# EAGLE board test pcb (EAGLE 7.7.0)

Size 100 x 80 mm. Coordinates in mm from the lower left corner, seen from the top.
Outline: 0,0 100,0 100,80 0,80 0,0
Copper layers (1*16): Top 0.035mm / dielectric 1.5mm / Bottom 0.035mm
Design rules "default": minimum track width 10mil, minimum drill 24mil, track to track 8mil, track to pad 8mil, pad to pad 8mil, via to via 8mil, smd to smd 8mil, copper to edge 40mil, drill to drill 8mil, minimum pad ring 10mil, minimum via ring 8mil, stop-mask expansion 4mil, vias tented up to drill 0mil, thermal gap 10mil

## Footprints (pad centres in the part's own frame; a part is rotated, then mirrored left to right if it is on the bottom)
HOLES = drill 3 pad 5: P$1 0,0

## Placement (x,y rotation side)
U$1  HOLES  [HOLES]  76.2,8.89 0 top
U$2  HOLES  [HOLES]  63.5,8.89 0 top
U$3  HOLES  [HOLES]  50.8,8.89 0 top
U$4  HOLES  [HOLES]  38.1,8.89 0 top
U$5  HOLES  [HOLES]  25.4,8.89 0 top
U$6  HOLES  [HOLES]  12.7,8.89 0 top
U$7  HOLES  [HOLES]  76.2,21.59 0 top
U$8  HOLES  [HOLES]  63.5,21.59 0 top
U$9  HOLES  [HOLES]  50.8,21.59 0 top
U$10  HOLES  [HOLES]  38.1,21.59 0 top
U$11  HOLES  [HOLES]  25.4,21.59 180 top
U$12  HOLES  [HOLES]  12.7,21.59 0 top
U$13  HOLES  [HOLES]  12.7,34.29 0 top
U$14  HOLES  [HOLES]  25.4,34.29 0 top
U$15  HOLES  [HOLES]  38.1,34.29 0 top
U$16  HOLES  [HOLES]  50.8,34.29 0 top
U$17  HOLES  [HOLES]  63.5,34.29 0 top
U$19  HOLES  [HOLES]  76.2,34.29 0 top
U$20  HOLES  [HOLES]  76.2,46.99 0 top
U$21  HOLES  [HOLES]  63.5,46.99 0 top
U$22  HOLES  [HOLES]  50.8,46.99 0 top
U$23  HOLES  [HOLES]  38.1,46.99 0 top
U$24  HOLES  [HOLES]  25.4,46.99 0 top
U$25  HOLES  [HOLES]  12.7,46.99 0 top
U$26  HOLES  [HOLES]  12.7,59.69 0 top
U$27  HOLES  [HOLES]  25.4,59.69 0 top
U$28  HOLES  [HOLES]  38.1,59.69 0 top
U$29  HOLES  [HOLES]  50.8,59.69 0 top
U$30  HOLES  [HOLES]  63.5,59.69 0 top
U$31  HOLES  [HOLES]  76.2,59.69 0 top
U$32  HOLES  [HOLES]  12.7,72.39 0 top
U$33  HOLES  [HOLES]  25.4,72.39 0 top
U$34  HOLES  [HOLES]  38.1,72.39 0 top
U$35  HOLES  [HOLES]  50.8,72.39 0 top
U$36  HOLES  [HOLES]  63.5,72.39 0 top
U$37  HOLES  [HOLES]  76.2,72.39 0 top

## Library data of the parts
U$1-U$17 U$19-U$37 = lichtbak